# Altium PCB PCB1.PcbDoc
Units mm, origin at the board's own origin, x right, y up, seen from the top; angles counter-clockwise.
Board outline 150 x 100 mm, 2 copper layers (Top Layer, Bottom Layer); 54 components, 79 nets, 377 pads, 96 vias.
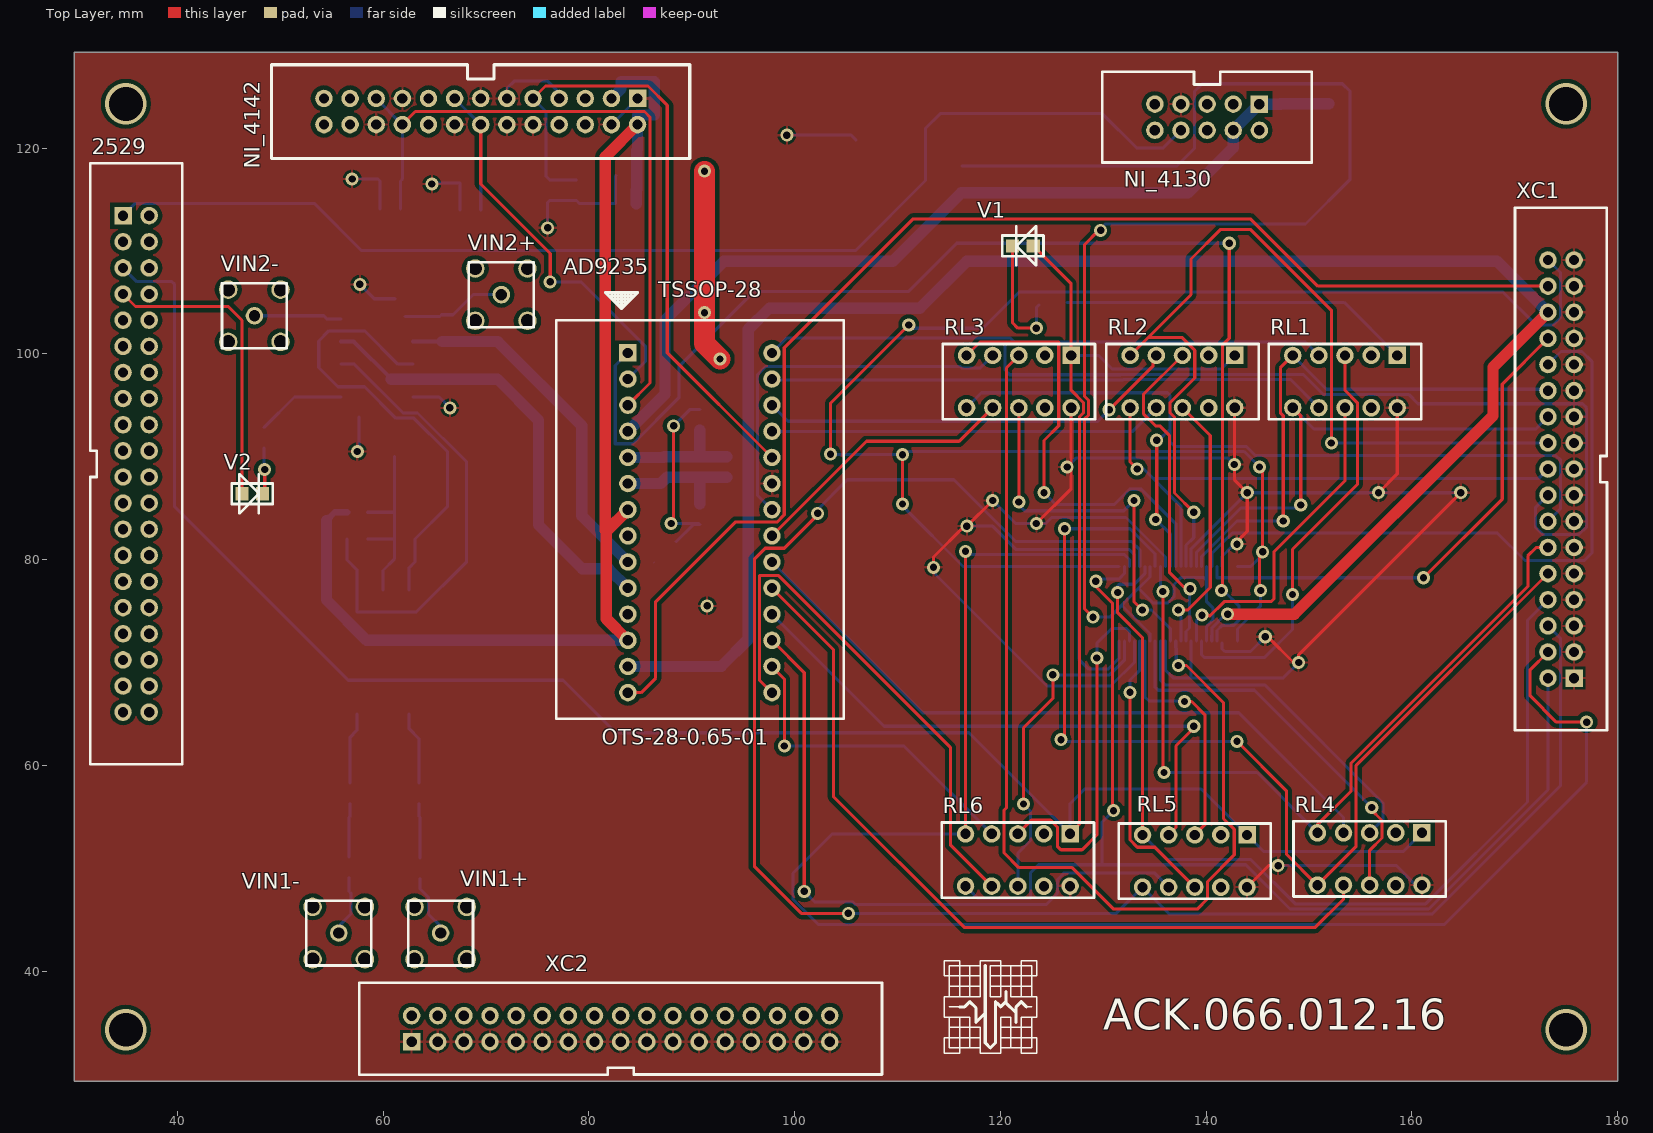
[diagram p0: Top Layer view]
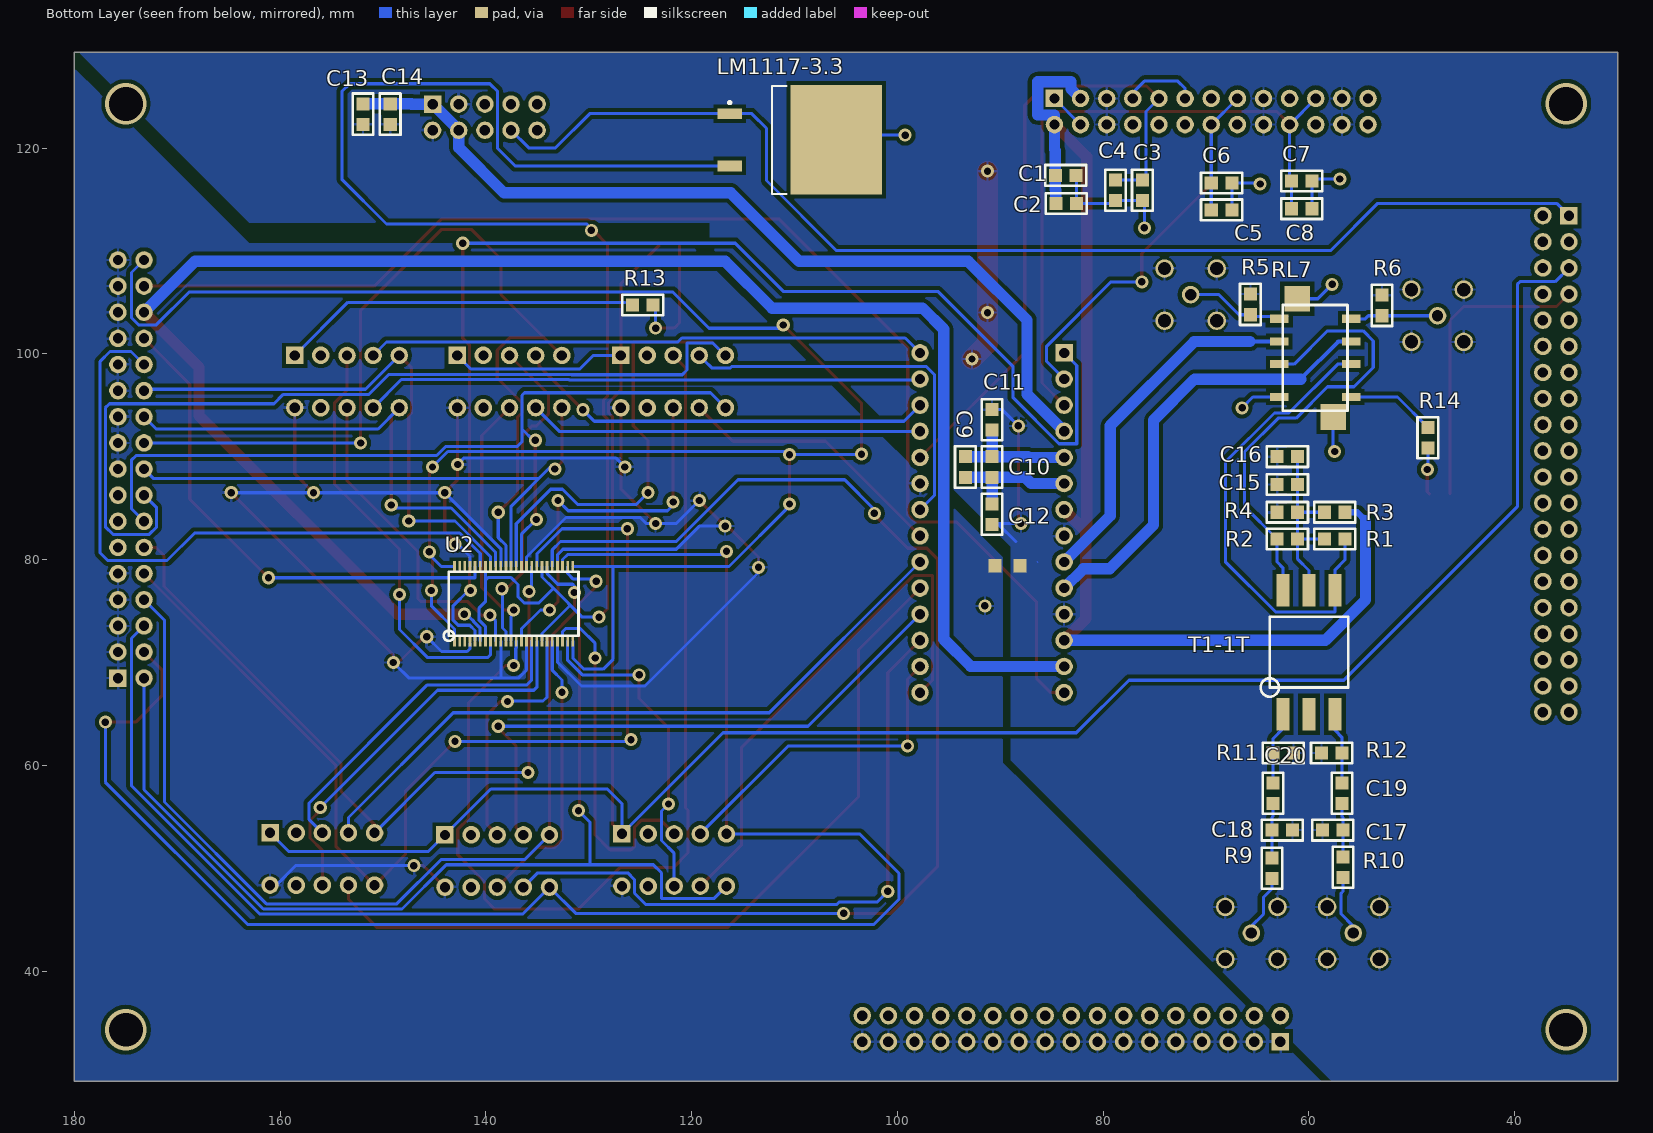
[diagram p1: Bottom Layer view, seen from below]

## Layer stack, top to bottom
Top Solder: solder mask 0.0102, Solder Resist, Dk 3.5
Top Layer: signal copper 0.0356
Dielectric 1: dielectric 0.32, FR-4, Dk 4.8
Bottom Layer: signal copper 0.0356
Bottom Solder: solder mask 0.0102, Solder Resist, Dk 3.5

## Board outline
30,29.3 180,29.3 180,129.3 30,129.3

## Design rules (kind name [scope] priority, off if disabled: settings)
Clearance [All] p1: gap=0.2 except(0.1: Arc-Text Track-Text SMDPad-Text THPad-Text Via-Text Fill-Text Region-Text Text-Text; 0.3: Arc-Via Track-Via; 0.4: Arc-Poly Track-Poly SMDPad-Poly THPad-Poly Via-Poly Poly-Poly Poly-Region Poly-Text; 0.5: THPad-Via; 1: SMDPad-Via Via-Via; 4: Fill-Poly)
PolygonConnect [All] p1: connectstyle=Relief reliefconductorwidth=0.254 reliefentries=4 polygonreliefangle="90 Angle" airgapwidth=0.254
RoutingLayers RoutingLayers_2 [InNet('GND')] p1 off: top layer_v5=FALSE bottom layer_v5=FALSE
RoutingLayers RoutingLayers_1 [InNet('AGND')] p2 off: top layer_v5=FALSE bottom layer_v5=FALSE
RoutingLayers [All] p3: top layer_v5=TRUE bottom layer_v5=TRUE
RoutingPriority [InNetClass('not gnd')] p1: routingpriority=0
RoutingVias [All] p1: holewidth=0.711 width=1.27 viastyle="Through Hole" minholewidth=0.711 minwidth=1.27 maxholewidth=0.711 maxwidth=1.27
SMDNeckDown [InNetClass('analog')] p1: percent=50.000
SilkToSilkClearance [All] p1 off: silktosilkclearance=0.254
SilkToSolderMaskClearance [IsPad] p1 off: minsilkscreentomaskgap=0.254 clearancetoexposedcopper=TRUE
SolderMaskExpansion [All] p1: expansion=0.102
Width Width_analog [InNetClass('analog')] p1: maxlimit=1.1 minlimit=1.1 preferedwidth=1.1
Width [All] p2: maxlimit=2 minlimit=0.1 preferedwidth=0.3
26 further rules are at their usual default settings.

## Classes and differential pairs
component class Sheet1: 2529 AD9235 C1 C2 C3 C4 C5 C6 C7 C8 C9 C10 C11 C12 C13 C14 LM1117-3.3 NI_4130 NI_4142 R13 RL1 RL2 RL3 RL4 RL5 RL6 U2 V1 XC1 XC2
component class Sheet2: C15 C16 C17 C18 C19 C20 R1 R2 R3 R4 R5 R6 R9 R10 R11 R12 RL7 T1-1T VIN1+ VIN1- VIN2+ VIN2-
net class "not gnd": 2529_7 AVDD CH-0 CH-1 CH_1 CH_2 CH_3 DIO_0 DIO_1 DIO_2 DIO_3 DIO_4 DIO_5 DIO_6 DIO_7 DIO_8 DIO_9 DIO_10 DIO_11 DIO_12 DIO_13 DIO_14 DIO_15 DIO_16 DIO_17 DIO_18 DIO_19 DIO_20 DIO_21 DIO_22 DIO_23 Net2529_5 NetAD9235_1 NetAD9235_15 NetAD9235_16 NetAD9235_17 NetAD9235_18 NetAD9235_19 NetAD9235_20 NetAD9235_21 NetAD9235_22 NetAD9235_25 NetAD9235_26 NetAD9235_27 NetAD9235_28 NetC15_2 NetC17_2 NetC18_1 NetC19_2 NetC20_2 NetLM1117-3.3_3 NetR1_1 NetR2_2 NetR5_2 NetR6_1 NetR9_2 NetR10_2 NetR13_1 NetR13_2 NetR14_1 NetR14_2 NetRL1_3 NetRL1_10 NetRL2_3 NetRL2_10 NetRL3_3 NetRL3_10 NetRL4_3 NetRL4_10 NetRL5_3 NetRL5_10 NetRL6_3 NetRL6_10 REFB REFT VIN+ VIN-
net class analog: AVDD CH-1 DIO_14 REFB REFT VIN+ VIN-

## Components (designator, comment, footprint, x,y, rotation, side; value= is the part's Value field where it differs from the comment)
2529 "IDC-40" IDC-40 36,89.3 r0 top
AD9235 "Adapter_TSSOP-28_DIP-28" "Adapter_TSSOP-28_DIP-28 - 14mm" 90.8,91.2 r0 top
C1 "1uF" C_0805 83.65,117.35 r180 bottom
C2 "0.1uF" C_0805 83.6,114.6 r180 bottom
C3 "1uF" C_0805 76.2,115.9 r270 bottom
C4 "0.1uF" C_0805 78.8,115.9 r270 bottom
C5 "1uF" C_0805 68.5,114 r180 bottom
C6 "0.1uF" C_0805 68.5,116.6 r180 bottom
C7 "1uF" C_0805 60.7,116.8 r180 bottom
C8 "0.1uF" C_0805 60.7,114.1 r180 bottom
C9 "10uF" C_0805 93.4,89 r90 bottom
C10 "0.1uF" C_0805 90.8,89 r90 bottom
C11 "0.1uF" C_0805 90.8,93.6 r90 bottom
C12 "0.1uF" C_0805 90.8,84.4 r90 bottom
C13 "1uF" C_0805 151.95,123.3 r270 bottom
C14 "0.1uF" C_0805 149.3,123.3 r270 bottom
C15 "0.1uF" C_0805 62.1,87.3 r180 bottom
C16 "0.33uF" C_0805 62.1,90 r180 bottom
C17 "150pF" C_0805 57.7,53.7 r180 bottom
C18 "150pF" C_0805 62.6,53.7 r180 bottom
C19 "2.2nF" C_0805 56.8,57.3 r90 bottom
C20 "2.2nF" C_0805 63.5,57.3 r90 bottom
LM1117-3.3 "LM1117-3.3" D2PAK_N 109.5,120.8 r180 bottom
NI_4130 "IDC-10" IDC-10 140.1,123 r270 top
NI_4142 "IDC-26" IDC-26 69.5,123.55 r270 top
R1 "50R" R_0805 57.5,82 r0 bottom
R2 "50R" R_0805 62.1,82 r0 bottom
R3 "1k" R_0805 57.5,84.6 r180 bottom
R4 "1k" R_0805 62.1,84.6 r180 bottom
R5 "50R" R_0805 65.7,104.8 r270 bottom
R6 "50R" R_0805 52.9,104.7 r90 bottom
R9 "50R" R_0805 63.6,50 r270 bottom
R10 "50R" R_0805 56.7,50.1 r270 bottom
R11 "50R" R_0805 62.5,61.2 r180 bottom
R12 "50R" R_0805 57.8,61.2 r180 bottom
R13 "270R" R_0805 124.75,104.75 r180 bottom
R14 "270R" R_0805 48.45,91.85 r270 bottom
RL1 "Relay_G6S-2" Relay_G6S-2 153.5,97.3 r270 top
RL2 "Relay_G6S-2" Relay_G6S-2 137.7,97.3 r270 top
RL3 "Relay_G6S-2" Relay_G6S-2 121.8,97.3 r270 top
RL4 "Relay_G6S-2" Relay_G6S-2 155.9,50.9 r270 top
RL5 "Relay_G6S-2" Relay_G6S-2 138.9,50.7 r270 top
RL6 "Relay_G6S-2" Relay_G6S-2 121.7,50.8 r270 top
RL7 "Relay_G6KU-2F-RF" Relay_G6KU-2F-RF 59.4,99.6 r0 bottom
T1-1T "T1-1T" T1-1T 60,71 r90 bottom
U2 "74AVC16244" 74AVC16244 137.3,75.7 r90 bottom
V1 "LED" LED 122.2,110.5 r180 top
V2 "LED" LED 47.3,86.4 r0 top
VIN1+ "SMB" SMB 65.6,43.7 r0 top
VIN1- "SMB" SMB 55.7,43.7 r0 top
VIN2+ "SMB" SMB 71.5,105.75 r180 top
VIN2- "SMB" SMB 47.5,103.7 r180 top
XC1 "IDC-34" IDC-34 174.5,88.8 r180 top
XC2 "IDC-34" IDC-34 83.1,34.4 r90 top

## Footprints (in the part's own frame and the unit in brackets; to place one, negate y for a bottom-side part, rotate by r counter-clockwise, add the part's x,y. Pads: shape width x height; smd on the part's side, far side on the other; paste and mask are expansions set on the pad)
74AVC16244 [mm]
  rect 1.05x0.27 smd: 1(-3.625,5.75) 2(-3.625,5.25) 3(-3.625,4.75) 4(-3.625,4.25) 5(-3.625,3.75) 6(-3.625,3.25) 7(-3.625,2.75) 8(-3.625,2.25) 9(-3.625,1.75) 10(-3.625,1.25) 11(-3.625,0.75) 12(-3.625,0.25) 13(-3.625,-0.25) 14(-3.625,-0.75) 15(-3.625,-1.25) 16(-3.625,-1.75) 17(-3.625,-2.25) 18(-3.625,-2.75) 19(-3.625,-3.25) 20(-3.625,-3.75) 21(-3.625,-4.25) 22(-3.625,-4.75) 23(-3.625,-5.25) 24(-3.625,-5.75) 25(3.625,-5.75) 26(3.625,-5.25) 27(3.625,-4.75) 28(3.625,-4.25) 29(3.625,-3.75) 30(3.625,-3.25) 31(3.625,-2.75) 32(3.625,-2.25) 33(3.625,-1.75) 34(3.625,-1.25) 35(3.625,-0.75) 36(3.625,-0.25) 37(3.625,0.25) 38(3.625,0.75) 39(3.625,1.25) 40(3.625,1.75) 41(3.625,2.25) 42(3.625,2.75) 43(3.625,3.25) 44(3.625,3.75) 45(3.625,4.25) 46(3.625,4.75) 47(3.625,5.25) 48(3.625,5.75)
  silkscreen extent -3.6,-6.3 3.1,6.8
"Adapter_TSSOP-28_DIP-28 - 14mm" [mm] "from aliexpress"
  rect 1.7x1.7 hole 1: 1(-7,8.89)
  round 1.7 hole 1: 2(-7,6.35) 3(-7,3.81) 4(-7,1.27) 5(-7,-1.27) 6(-7,-3.81) 7(-7,-6.35) 8(-7,-8.89) 9(-7,-11.43) 10(-7,-13.97) 11(-7,-16.51) 12(-7,-19.05) 13(-7,-21.59) 14(-7,-24.13) 15(7,-24.13) 16(7,-21.59) 17(7,-19.05) 18(7,-16.51) 19(7,-13.97) 20(7,-11.43) 21(7,-8.89) 22(7,-6.35) 23(7,-3.81) 24(7,-1.27) 25(7,1.27) 26(7,3.81) 27(7,6.35) 28(7,8.89)
  silkscreen extent -13.97,-26.67 13.97,14.76
C_0805 [mm]
  rect 1.27x1.27 smd: 1(-1,0) 2(1,0)
  silkscreen extent -2,-1 2,1
D2PAK_N [mm] "D2-PAK, 4-Leads, Body 8.8x10.4mm, Pitch 2.54mm, Lead Span 15.1mm, IPC Medium Density"
  rect 2.4x1.05 smd: 1(-6.8,2.54) 3(-6.8,-2.54)
  rect 8.9x10.65 smd: 2(3.55,0)
  silkscreen extent -6.93,-5.25 -1.3,5.25, body extent -2.7,-5.28 6.3,5.28, height 4.69
IDC-10 [mm]
  rect 1.7x1.7 hole 1: 1(-1.27,5.08)
  round 1.7 hole 1: 2(1.27,5.08) 3(-1.27,2.54) 4(1.27,2.54) 5(-1.27,0) 6(1.27,0) 7(-1.27,-2.54) 8(1.27,-2.54) 9(-1.27,-5.08) 10(1.27,-5.08)
  silkscreen extent -4.4,-10.17 4.4,10.18
IDC-26 [mm]
  rect 1.7x1.7 hole 1: 1(-1.27,15.24)
  round 1.7 hole 1: 2(1.27,15.24) 3(-1.27,12.7) 4(1.27,12.7) 5(-1.27,10.16) 6(1.27,10.16) 7(-1.27,7.62) 8(1.27,7.62) 9(-1.27,5.08) 10(1.27,5.08) 11(-1.27,2.54) 12(1.27,2.54) 13(-1.27,0) 14(1.27,0) 15(-1.27,-2.54) 16(1.27,-2.54) 17(-1.27,-5.08) 18(1.27,-5.08) 19(-1.27,-7.62) 20(1.27,-7.62) 21(-1.27,-10.16) 22(1.27,-10.16) 23(-1.27,-12.7) 24(1.27,-12.7) 25(-1.27,-15.24) 26(1.27,-15.24)
  silkscreen extent -4.55,-20.32 4.55,20.31
IDC-34 [mm]
  rect 1.7x1.7 hole 1: 1(-1.27,20.32)
  round 1.7 hole 1: 2(1.27,20.32) 3(-1.27,17.78) 4(1.27,17.78) 5(-1.27,15.24) 6(1.27,15.24) 7(-1.27,12.7) 8(1.27,12.7) 9(-1.27,10.16) 10(1.27,10.16) 11(-1.27,7.62) 12(1.27,7.62) 13(-1.27,5.08) 14(1.27,5.08) 15(-1.27,2.54) 16(1.27,2.54) 17(-1.27,0) 18(1.27,0) 19(-1.27,-2.54) 20(1.27,-2.54) 21(-1.27,-5.08) 22(1.27,-5.08) 23(-1.27,-7.62) 24(1.27,-7.62) 25(-1.27,-10.16) 26(1.27,-10.16) 27(-1.27,-12.7) 28(1.27,-12.7) 29(-1.27,-15.24) 30(1.27,-15.24) 31(-1.27,-17.78) 32(1.27,-17.78) 33(-1.27,-20.32) 34(1.27,-20.32)
  silkscreen extent -4.47,-25.4 4.48,25.4
IDC-40 [mm]
  rect 1.7x1.7 hole 1: 1(-1.27,24.13)
  round 1.7 hole 1: 2(1.27,24.13) 3(-1.27,21.59) 4(1.27,21.59) 5(-1.27,19.05) 6(1.27,19.05) 7(-1.27,16.51) 8(1.27,16.51) 9(-1.27,13.97) 10(1.27,13.97) 11(-1.27,11.43) 12(1.27,11.43) 13(-1.27,8.89) 14(1.27,8.89) 15(-1.27,6.35) 16(1.27,6.35) 17(-1.27,3.81) 18(1.27,3.81) 19(-1.27,1.27) 20(1.27,1.27) 21(-1.27,-1.27) 22(1.27,-1.27) 23(-1.27,-3.81) 24(1.27,-3.81) 25(-1.27,-6.35) 26(1.27,-6.35) 27(-1.27,-8.89) 28(1.27,-8.89) 29(-1.27,-11.43) 30(1.27,-11.43) 31(-1.27,-13.97) 32(1.27,-13.97) 33(-1.27,-16.51) 34(1.27,-16.51) 35(-1.27,-19.05) 36(1.27,-19.05) 37(-1.27,-21.59) 38(1.27,-21.59) 39(-1.27,-24.13) 40(1.27,-24.13)
  silkscreen extent -4.47,-29.21 4.48,29.21
LED [mm]
  rect 1.27x1.27 smd: 1(-1,0) 2(1,0)
  silkscreen extent -2,-1.91 2,1.91
R_0805 [mm]
  rect 1.27x1.27 smd: 1(-1,0) 2(1,0)
  silkscreen extent -2,-1 2,1
Relay_G6KU-2F-RF [mm]
  rect 1.8x0.8 smd: 1(-3.5,3.8) 2(-3.5,0.6) 3(-3.5,-1.6) 4(-3.5,-3.8) 5(3.5,-3.8) 6(3.5,-1.6) 7(3.5,0.6) 8(3.5,3.8)
  rect 2.5x2.5 smd: GND(-1.75,5.75) GND(1.75,-5.75)
  silkscreen extent -3.15,-5.15 3.15,5.15
Relay_G6S-2 [mm]
  rect 1.7x1.7 hole 1: 1(-2.54,5.08)
  round 1.7 hole 1: 3(-2.54,0) 4(-2.54,-2.54) 5(-2.54,-5.08) 8(2.54,-5.08) 9(2.54,-2.54) 10(2.54,0) 12(2.54,5.08)
  silkscreen extent -3.65,-7.4 3.65,7.4
SMB [mm]
  round 1.8 hole 1.3: 0(-2.54,-2.54) 0(-2.54,2.54) 0(2.54,-2.54) 0(2.54,2.54)
  round 1.7 hole 1.1: 1(0,0)
  silkscreen extent -3.15,-3.15 3.15,3.15
T1-1T [mm]
  rect 3.18x1.27 smd: 1(6.03,2.54) 2(6.03,0) 3(6.03,-2.54) 4(-6.03,-2.54) 5(-6.03,0) 6(-6.03,2.54)
  silkscreen extent -4.32,-3.81 3.43,4.7

## Part data
2529: "разъем 2529"
AD9235: "from aliexpress"
C1 C2 C3 C4 C5 C6 C7 C8 C9 C10 C11 C12 C13 C14 C15 C16 C17 C18 C19 C20: library part "capacitor 0805"
LM1117-3.3: library part "Volt Reg", "Voltage Regulator"
NI_4130: "разъем 4130"
NI_4142: "разъем 4142"
R1 R2 R3 R4 R5 R6 R9 R10 R11 R12 R13 R14: library part "resistor 0805"

## Free pads (board coordinates)
  rect 1.27x1.27 smd far side: 1(88.1,79.4) 1(90.5,79.4)

## Via types
v1: diameter 1.27, hole 0.711, Top Layer to Bottom Layer, 80 vias
v2: diameter 1.7, hole 1, Top Layer to Bottom Layer, 12 vias
v3: diameter 4, hole 3.3, Top Layer to Bottom Layer, 4 vias

## Nets (pads, with @x,y where several pads share a name; then routed paths per layer and width w, separated by ;. In a path a pad name is that pad's centre, name@x,y a point inside that pad or via, vN(x,y) a via of type N, cw(c..) or ccw(c..) an arc to the next point about the centre after c; other vN are vias at no path point)
2529_7: 2529.7 V2.1 | length 29.5
  Top Layer w0.3: 2529.7 35.943,104.597 44.958,104.597 46.3,103.255 V2.1
AGND: AD9235.8 AD9235.11 C11.2 C12.1 C13.2 C14.2 C15.1 C16.1 C17.1 C18.2 NI_4130.2 NI_4130.3 NI_4142.5 NI_4142.6 NI_4142.17 NI_4142.18 NI_4142.23 NI_4142.24 pad.1@88.1,79.4 R4.1 R5.1 R6.2 R11.2 R12.1 VIN1+.0 VIN1-.0 VIN2+.0 VIN2-.0 | length 38.2
  Top Layer w0.3: v1(88,83.5) 88,83.25 88.25,83.5 v1(88.25,93)
  Top Layer w2: v1(91.25,117.75) v1(91.25,104) 91.25,101 v1(92.75,99.5)
  Bottom Layer w0: 86.3,79.7 86.4,79.8
  Bottom Layer w0.3: v1(88,83.5) 90.7,83.5 C12.1 90.15,83.4 88.5,81.75 ; v1(88.25,93) 89.85,94.6 C11.2
AVDD: AD9235.7 AD9235.12 C1.1 C2.1 NI_4142.2 NI_4142.3 R3.2 | length 115.1
  Top Layer w1.1: AD9235.12 81.7,74.25 81.7,82.75 ; AD9235.7 81.7,82.75 ; NI_4142.2 81.6,119.14 81.6,82.85 81.7,82.75
  Bottom Layer w0.635: 54.5,83.8 55.3,84.6 R3.2
  Bottom Layer w1.1: 54.5,83.8 54.5,76.07 58.42,72.15 AD9235.12 ; NI_4142.3 83.134,125.754 83.134,126.441 86.36,126.441 86.36,123.215 84.74,123.215 NI_4142.2 84.74,119.851 84.65,119.761 C1.1 84.65,115.976 84.6,115.926 C2.1
CH-0: 2529.1 LM1117-3.3.1 NI_4130.8 | length 115.8
  Bottom Layer w0.3: 2529.1 35.93,114.63 53.315,114.63 57.912,110.033 105.918,110.033 112.725,116.84 112.725,121.92 114.145,123.34 LM1117-3.3.1 129.91,123.34 133.235,120.015 135.845,120.015 NI_4130.8
CH-1: AD9235.4 C13.1 C14.1 NI_4130.1 NI_4130.4 | length 86.6
  Bottom Layer w1.1: AD9235.4 87.401,96.071 87.401,103.276 93.125,109 109.559,109 116.205,115.646 138.244,115.646 142.64,120.042 NI_4130.4 142.621,121.73 145.161,124.27 NI_4130.1 147.218,124.27 147.248,124.3 C14.1 150.622,124.3 C13.1
CH_1: AD9235.24 C3.1 C4.1 NI_4142.9 | length 64
  Top Layer w0.3: NI_4142.9 75.795,126.035 85.75,126.035 87.63,124.155 87.63,100.1 AD9235.24
  Bottom Layer w0.3: NI_4142.9 75.844,123.556 75.844,117.256 C3.1 C4.1
CH_2: AD9235.2 C5.1 C6.1 NI_4142.14 NI_4142.15 | length 45.7
  Top Layer w0.3: NI_4142.14 69.5,116.5 76.25,109.75 v1(76.25,107)
  Bottom Layer w0.3: NI_4142.15 66.954,124.82 69.494,122.28 NI_4142.14 C6.1 C5.1 ; v1(76.25,107) 79.25,107 85.5,100.75 85.5,99.25 AD9235.2
CH_3: AD9235.3 C7.1 C8.1 NI_4142.20 NI_4142.21 | length 65.6
  Top Layer w0.3: NI_4142.20 63.146,123.546 85.408,123.546 85.954,123 85.954,97.164 AD9235.3
  Bottom Layer w0.3: NI_4142.21 59.334,124.82 61.874,122.28 NI_4142.20 61.88,116.98 C7.1 C8.1
DIO_0: RL6.8 U2.26 XC1.2 | length 109.9
  Top Layer w0.3: v1(129.285,77.895) 129.285,77.381 130.9,75.766 130.9,55.7 v1(131,55.6)
  Bottom Layer w0.3: RL6.8 117.839,47.041 122.936,47.041 122.936,49.555 123.723,50.343 129.9,50.343 ; v1(129.285,77.895) 129.49,78.1 131.5,78.1 132.05,78.65 U2.26 ; v1(131,55.6) 129.9,54.5 129.9,50.343 ; XC1.2 173.23,57.635 161.628,46.033 148.158,46.033 143.848,50.343 129.9,50.343
DIO_1: RL6.5 U2.27 XC1.4 | length 166.5
  Top Layer w0.3: RL6.5 v1(116.62,80.8) ; XC1.4 171.5,69.29 171.5,66.75 174.05,64.2 v1(176.987,64.2)
  Bottom Layer w0.3: RL6.5 103.683,53.34 99.847,49.505 99.847,46.99 102.304,44.533 163.151,44.533 176.987,58.369 v1(176.987,64.2) ; v1(116.62,80.8) 116.92,80.5 132.06,80.5 132.55,80.01 U2.27
DIO_2: RL5.8 U2.29 XC1.6 | length 178.9
  Top Layer w0.3: v1(102.25,84.5) 102.25,84.343 99.009,81.102 97.155,81.102 96.088,80.035 96.088,50.19 100.66,45.618 v1(105.232,45.618)
  Bottom Layer w0.3: v1(102.25,84.5) 102.25,84.876 105.131,87.757 115.493,87.757 121.5,81.75 132.75,81.75 133.55,80.95 U2.29 ; v1(105.232,45.618) 131.278,45.618 RL5.8 136.447,45.533 161.96,45.533 174.447,58.02 174.447,72.343 XC1.6
DIO_3: RL5.5 U2.30 XC1.8 | length 93.8
  Top Layer w0.3: v1(131.4,76.8) 131.4,74.823 133.82,72.403 RL5.5
  Bottom Layer w0.3: v1(131.4,76.8) 131.4,77.425 131.575,77.6 133.021,77.6 134.05,78.63 U2.30 ; RL5.5 136.217,50.843 144.356,50.843 148.666,46.533 161.341,46.533 171.247,56.439 171.247,74.117 XC1.8
DIO_4: RL4.8 U2.32 XC1.10 | length 105.7
  Top Layer w0.3: v1(125.9,62.5) 126.25,62.85 v1(126.25,83) ; v1(143.002,62.332) 147.803,57.531 147.803,51.377 RL4.8 154.584,52.124 154.584,59.994 XC1.10
  Bottom Layer w0.3: v1(125.9,62.5) 125.9,62.4 125.968,62.332 v1(143.002,62.332) ; v1(126.25,83) 132.6,83 135.05,80.55 U2.32
DIO_5: RL4.5 U2.33 XC1.12 | length 75.3
  Top Layer w0.3: v1(135.8,76.9) 135.8,59.4 v1(135.9,59.3) ; RL4.5 150.82,54.22 154.084,57.484 154.084,60.201 171.272,77.389 171.272,80.367 172.085,81.18 XC1.12
  Bottom Layer w0.3: U2.33 135.55,77.25 135.5,77.2 v1(135.8,76.9) ; v1(135.9,59.3) 144.96,59.3 RL4.5
DIO_6: RL3.8 U2.35 XC1.14 | length 86
  Top Layer w0.3: v1(135.1,83.9) 135.1,83.868 135.331,84.099 135.2,84.231 v1(135.2,91.6)
  Bottom Layer w0.3: RL3.8 118.175,96.215 136.246,96.215 136.5,95.961 136.5,92.7 ; v1(135.1,83.9) 136.55,82.45 U2.35 136.55,80.315 ; v1(135.2,91.6) 135.4,91.6 136.5,92.7 ; XC1.14 174.447,84.937 174.447,89.7 174.419,89.7 174,90.119 144.787,90.119 143.907,91 136.94,91 136.5,91.44 136.5,92.7
DIO_7: RL3.5 U2.36 XC1.16 | length 129.8
  Top Layer w0.3: RL3.5 118.023,101.143 125.654,101.143 125.68,101.117 125.68,93 124.25,91.57 v1(124.25,86.5)
  Bottom Layer w0.3: RL3.5 117.92,101.04 120.46,101.04 120.46,98.425 120.917,97.968 131.697,97.968 131.729,98 149.421,98 151.361,96.06 159.691,96.06 160.603,95.148 176.589,95.148 176.987,94.75 176.987,83.185 176.251,82.448 172.72,82.448 172.009,83.16 172.009,85.039 XC1.16 ; v1(124.25,86.5) 125.415,85.335 131.05,85.335 132.551,86.835 133.699,86.835 137.05,83.484 U2.36
DIO_8: RL2.8 U2.37 XC1.18 | length 56.8
  Top Layer w0.3: RL2.8 132.62,89.48 v1(133.3,88.8)
  Bottom Layer w0.3: v1(133.3,88.8) 133.532,88.8 133.733,89 137.55,85.183 U2.37 ; 134.833,87.9 172.33,87.9 XC1.18
DIO_9: RL2.5 U2.38 XC1.20 | length 92.2
  Top Layer w0.3: RL2.5 138.532,105.752 138.532,109.22 141.376,112.065 144.348,112.065 152.171,104.242 v1(152.171,91.34) ; 134.38,101.6 137.637,101.6 138.9,100.337 138.9,97.657 136.5,95.257 136.5,94.263 136.923,93.84 136.923,86.477 v1(138.8,84.6)
  Bottom Layer w0.3: U2.38 138.05,81.381 138.8,82.13 v1(138.8,84.6) ; v1(152.171,91.34) XC1.20
DIO_10: RL1.8 U2.40 XC1.22 | length 49.5
  Top Layer w0.3: RL1.8 149.045,94.135 149.2,93.98 149.2,93.29 v1(149.2,85.3)
  Bottom Layer w0.3: U2.40 139.05,80.681 143.383,85.014 148.9,85.014 148.9,85.27 148.93,85.3 v1(149.2,85.3) ; RL1.8 150.48,92.7 172.05,92.7 XC1.22
DIO_11: RL1.5 U2.41 XC1.24 | length 53.3
  Top Layer w0.3: v1(147.5,83.75) 147.5,93.983 147.22,94.263 147.22,98.637 147.218,98.639 RL1.5
  Bottom Layer w0.3: U2.41 139.55,80.292 143.008,83.75 v1(147.5,83.75) ; RL1.5 151.7,96.56 173.09,96.56 XC1.24
DIO_12: U2.43 XC1.26 | length 64.3
  Bottom Layer w0.3: U2.43 140.55,80.585 142.551,82.585 168.315,82.585 170.992,79.908 176.759,79.908 177.495,80.645 177.495,99.263 176.53,100.228 174.498,100.228 XC1.26
DIO_13: U2.44 XC1.28 | length 49.5
  Top Layer w0.3: v1(161.138,78.232) 168.783,85.877 168.783,97.053 XC1.28
  Bottom Layer w0.3: U2.44 141.05,78.232 v1(161.138,78.232)
DIO_14: AD9235.13 U2.6 XC1.30 | length 174.2
  Top Layer w1.1: v1(142.1,74.7) 148.6,74.7 167.883,93.983 167.883,98.693 XC1.30
  Bottom Layer w0.3: U2.6 140.55,72.243 140.55,72.657 140.565,72.672 140.565,73.324 141.185,73.943 141.185,73.992 v1@141.591,74.398
  Bottom Layer w1.1: AD9235.13 92.86,69.61 95.5,72.25 95.5,102.383 97.561,104.445 112.192,104.445 116.747,109 168.27,109 XC1.30
DIO_15: AD9235.14 XC1.32 | length 125.1
  Top Layer w0.3: AD9235.14 85.09,67.07 86.5,68.48 86.5,75.908 94.234,83.642 98.289,83.642 99,84.353 99,100.6 111.485,113.085 144.355,113.085 150.86,106.58 XC1.32
DIO_16: U2.1 U2.24 U2.25 U2.48 XC1.34 | length 196.3
  Top Layer w0.3: v1(103.5,90.25) 103.5,95.2 v1(111.1,102.8) ; v1(110.5,85.4) v1@110.5,90.6 ; v1(145.2,89) 145.5,88.7 v1(145.5,80.75) ; v1@145.2,80.7 145.2,77.1 v1(145.3,77)
  Bottom Layer w0.3: v1(103.5,90.25) 103.55,90.2 v1(110.5,90.2) 110.8,90.5 143.7,90.5 v1(145.2,89) ; v1(110.5,85.4) 110.5,85.2 116.376,79.324 127.629,79.324 ; v1@111.1,102.489 118.313,102.489 121.818,105.994 168.859,105.994 172.034,102.819 173.761,102.819 174.447,103.505 174.447,107.903 XC1.34 ; U2.24 131.55,70.427 130.473,69.349 128.6,69.349 127.629,70.321 127.629,79.324 ; U2.25 127.629,79.324 ; U2.1 143.05,73.258 145.3,75.508 v1(145.3,77) ; U2.48 144.325,79.325 145.2,80.2 v1@145.2,80.7 ; v1@145.2,80.8 145.25,80.75 v1(145.5,80.75)
DIO_17: XC2.2
DIO_18: XC2.4
DIO_19: XC2.6
DIO_20: XC2.8
DIO_21: XC2.10
DIO_22: XC2.12
DIO_23: XC2.14
GND: AD9235.23 C1.2 C2.2 C3.2 C4.2 C5.2 C6.2 C7.2 C8.2 LM1117-3.3.2 NI_4130.7 NI_4142.1 NI_4142.4 NI_4142.7 NI_4142.10 NI_4142.11 NI_4142.12 NI_4142.13 NI_4142.16 NI_4142.19 NI_4142.22 pad.1@90.5,79.4 RL1.12 RL2.12 RL3.12 RL4.12 RL5.12 RL6.12 RL7.8 RL7.GND U2.4 U2.10 U2.15 U2.21 U2.28 U2.34 U2.39 U2.45 XC1.1 XC1.3 XC1.5 XC1.7 XC1.9 XC1.11 XC1.13 XC1.15 XC1.17 XC1.19 XC1.21 XC1.23 XC1.25 XC1.27 XC1.29 XC1.31 XC1.33 XC2.1 XC2.3 XC2.5 XC2.7 XC2.9 XC2.11 XC2.13 XC2.15 XC2.17 XC2.19 XC2.21 XC2.23 XC2.25 XC2.27 XC2.29 XC2.31 XC2.33 | length 285
  Top Layer w0.3: v1(113.5,79.25) 113.5,80.25 116.5,83.25 v1(116.75,83.25) v1(119.25,85.75) ; v1(123.5,83.5) 126.88,86.88 RL3.12 ; v1@142.75,81.5 144,82.75 v1(144,86.5) 142.78,87.72 RL2.12 ; RL5.12 146.07,50.25 v1(147,50.25) ; v1(145.75,72.5) 146,72.5 148.5,70 v1(149,70) 149,70.75 v1(164.75,86.5) ; v1(156.75,86.5) 158.58,88.33 RL1.12
  Bottom Layer w0.3: v1(57,117) 59.5,117 C7.2 C8.2 ; v1(57.5,90.5) 57.65,90.65 RL7.GND@57.65,93.85 ; v1(57.75,106.75) 59.15,105.35 RL7.GND@61.15,105.35 ; RL7.8 65.45,95.8 v1(66.5,94.75) ; v1(64.75,116.5) 64.85,116.6 C6.2 C5.2 ; NI_4142.11 72.04,125.79 72.75,126.5 76,126.5 77.12,125.38 NI_4142.7 ; v1(76,112.25) 76,114.7 C3.2 C4.2 79.1,114.6 C2.2 82.6,117.3 C1.2 ; NI_4142.4 NI_4142.1 ; v1(99.25,121.25) 105.5,121.25 LM1117-3.3.2 ; v1(113.5,79.25) 113.5,78.75 124.535,67.715 130.715,67.715 133.05,70.05 U2.21 ; v1(116.75,83.25) 119.25,83.25 121.5,81 132.5,81 133.05,80.45 U2.28 ; v1(119.25,85.75) 121.5,83.5 v1(123.5,83.5) 124.415,83.5 125,84.085 132.222,84.085 136.05,80.257 U2.34 ; v1(126.5,89) 127.385,89.885 142.115,89.885 v1(142.75,89.25) ; U2.15 136.05,69.25 136.8,68.5 138.5,68.5 ; U2.10 138.55,68.55 138.5,68.5 ; U2.39 138.55,81.05 v1(144,86.5) v1(156.75,86.5) 164.5,86.5 164.75,86.25 v1(164.75,86.5) ; U2.45 141.55,80.3 v1@142.5,81.25 ; U2.4@141.565,71.883 141.565,71.315 141.819,71.061 144.311,71.061 v1(145.75,72.5) ; v1(147,50.25) 158.5,50.25 160.39,48.36 RL4.12 ; v1@148.75,69.75 147.5,68.5 138.5,68.5
  other v1: 91.5,75.5 143,81.5
Net2529_5: 2529.5 RL2.1 RL3.1 RL4.1 RL5.1 RL6.1 V1.1 | length 245.2
  Top Layer w0.3: V1.1 126.88,106.82 RL3.1 126.88,96.457 128.08,95.257 128.08,94.263 127.7,93.883 127.7,54.26 RL6.1
  Bottom Layer w0.3: 2529.5 36.07,107.01 39.49,107.01 39.75,106.75 39.75,85.142 56.617,68.275 77.5,68.275 82.605,63.17 116.95,63.17 RL6.1 126.78,56.28 128.2,57.7 139.52,57.7 RL5.1 145.58,51.64 159.18,51.64 RL4.1 ; RL3.1 129.568,99.84 130.882,98.527 141.466,98.527 RL2.1
NetAD9235_1: AD9235.1 U2.5 | length 120.2
  Top Layer w0.3: v1(141.5,77) 141.58,77.08 141.58,100.835 142.25,101.505 v1(142.25,110.75)
  Bottom Layer w0.3: AD9235.1 82.575,98.865 82.575,91.262 84.289,91.262 88.75,95.723 88.75,98.758 96.037,106.045 111.049,106.045 115.754,110.75 v1(142.25,110.75) ; U2.5@141.065,72.09 141.065,73.115 141.565,73.615 142.7,73.615 143.185,74.1 143.185,75.515 141.7,77 v1(141.5,77)
NetAD9235_15: AD9235.15 RL6.9 | length 52.5
  Top Layer w0.3: AD9235.15 96.596,68.274 96.596,78.435 98.45,78.435 115.138,61.747 115.138,52.282 RL6.9
NetAD9235_16: AD9235.16 RL6.4 | length 31.9
  Top Layer w0.3: AD9235.16 99.009,68.401 v1(99.009,61.874)
  Bottom Layer w0.3: v1(99.009,61.874) 110.626,61.874 RL6.4
NetAD9235_17: AD9235.17 RL5.9 | length 64.3
  Top Layer w0.3: AD9235.17 100.94,69.01 v1(100.94,47.752)
  Bottom Layer w0.3: v1(100.94,47.752) 101.988,46.703 105.682,46.703 105.903,46.482 124.46,46.482 125.552,47.574 125.552,48.895 126.213,49.555 134.965,49.555 RL5.9
NetAD9235_18: AD9235.18 RL5.4 | length 57.1
  Top Layer w0.3: RL5.4 137.075,53.955 137.075,61.9 138.8,63.625 v1(138.8,63.8)
  Bottom Layer w0.3: AD9235.18 108.69,63.8 v1(138.8,63.8)
NetAD9235_19: AD9235.19 RL4.9 | length 80.1
  Top Layer w0.3: AD9235.19 103.784,71.246 103.784,56.947 116.481,44.25 150.62,44.25 153.36,46.99 RL4.9
NetAD9235_20: AD9235.20 RL4.4 | length 67.3
  Bottom Layer w0.3: AD9235.20 112.455,65.115 143.178,65.115 153.36,54.933 RL4.4
NetAD9235_21: AD9235.21 RL3.9 | length 26.6
  Top Layer w0.3: AD9235.21 106.99,91.5 116,91.5 RL3.9
NetAD9235_22: AD9235.22 RL3.4 | length 37.7
  Bottom Layer w0.3: AD9235.22 96.4,86.25 96.4,97.981 97.169,98.75 116.113,98.75 116.223,98.64 118.06,98.64 118.76,99.34 118.76,99.84 RL3.4
NetAD9235_25: AD9235.25 RL2.9 | length 38.3
  Bottom Layer w0.3: AD9235.25 132.87,92.47 RL2.9
NetAD9235_26: AD9235.26 RL2.4 | length 41.1
  Top Layer w0.3: v1(130.581,94.564) 134.849,98.831 134.849,99.529 RL2.4
  Bottom Layer w0.3: AD9235.26 99.363,93.447 129.464,93.447 v1(130.581,94.564)
NetAD9235_27: AD9235.27 RL1.9 | length 54.3
  Bottom Layer w0.3: AD9235.27 97.882,97.468 131.904,97.468 131.936,97.5 148.22,97.5 RL1.9
NetAD9235_28: AD9235.28 RL1.4 | length 54.5
  Bottom Layer w0.3: AD9235.28 99.25,101.54 120.96,101.54 121.357,101.143 149.657,101.143 RL1.4
NetC15_2: C15.2 C16.2 R1.2 R2.1 R3.1 R4.2 T1-1T.2 | length 18.6
  Bottom Layer w0.3: R1.2 R2.1 ; R3.1 R4.2 ; T1-1T.2 60,78.943 61.1,80.043 R2.1 ; C16.2 61.1,88.646 C15.2 R4.2 ; R2.1 R4.2
NetC17_2: C17.2 C19.1 R10.1 | length 5.2
  Bottom Layer w0.3: R10.1 C17.2 56.7,54.94 56.8,55.04 C19.1
NetC18_1: C18.1 C20.1 R9.1 | length 5.3
  Bottom Layer w0.3: C20.1 63.5,55.04 63.6,54.94 C18.1 R9.1
NetC19_2: C19.2 R12.2 T1-1T.4 | length 6.9
  Bottom Layer w0.3: C19.2 R12.2 56.8,62.738 57.46,63.398 T1-1T.4
NetC20_2: C20.2 R11.1 T1-1T.6 | length 7.1
  Bottom Layer w0.3: T1-1T.6 62.54,63.546 63.5,62.586 R11.1 63.5,59.741 C20.2
NetLM1117-3.3_3: LM1117-3.3.3 U2.7 U2.18 U2.31 U2.42 | length 148.2
  Top Layer w0.3: v1(129,74.4) 128.2,75.2 128.2,93.676 128.58,94.056 128.58,95.464 128.2,95.844 128.2,110.623 129.577,112 v1(129.75,112)
  Bottom Layer w0.3: LM1117-3.3.3 137.16,118.26 138.862,119.962 138.862,125.5 139.612,126.25 153.25,126.25 154,125.5 154,116.967 149.657,112.624 130.2,112.624 129.577,112 v1(129.75,112) ; v1(129,74.4) 130.636,74.4 133.436,77.2 ; 131.883,75.483 134.55,72.815 U2.18 ; U2.31 134.55,78.6 134.55,78.314 133.436,77.2 ; U2.7 140.05,73.516 140.685,74.15 140.685,75.265 140.05,75.9 140.05,78 ; U2.42 140.05,78 ; 133.436,77.2 134.836,75.8 136.3,75.8 136.885,76.385 136.885,77.585 137.55,78.25 139.8,78.25 140.05,78
NetR1_1: R1.1 RL7.2 T1-1T.3 | length 46
  Bottom Layer w0.3: RL7.2 57.207,99 61.957,94.25 63.357,94.25 68.123,89.484 68.123,79.781 63.245,74.904 57.46,74.904 T1-1T.3 57.46,79.019 56.5,79.979 R1.1
NetR2_2: R2.2 RL7.7 T1-1T.1 | length 44.4
  Bottom Layer w0.3: T1-1T.1 62.54,79.223 63.1,79.783 R2.2 66.25,85.15 66.25,90.5 63,93.75 61.25,93.75 58.201,96.799 55.626,96.799 53.75,98.675 53.75,101.25 54.735,102.235 58.208,102.235 61.443,99 RL7.7
NetR5_2: R5.2 RL7.5 VIN2+.1 | length 10.2
  Bottom Layer w0.3: RL7.5@62.132,103.632 65.532,103.632 R5.2 66.8,103.8 68.75,105.75 VIN2+.1
NetR6_1: R6.1 RL7.4 VIN2-.1 | length 8.5
  Bottom Layer w0.3: VIN2-.1 R6.1 54.229,103.7 54.529,103.4 RL7.4
NetR9_2: R9.2 VIN1+.1 | length 6.1
  Bottom Layer w0.3: R9.2 63.6,48.006 64.414,47.192 64.414,45.542 65.6,44.357 VIN1+.1
NetR10_2: R10.2 VIN1-.1 | length 6
  Bottom Layer w0.3: VIN1-.1 55.7,44.374 56.871,45.544 56.871,47.574 56.7,47.745 R10.2
NetR13_1: R13.1 RL1.1 | length 34.2
  Bottom Layer w0.3: 126.5,105 153.42,105 RL1.1
NetR13_2: R13.2 V1.2 | length 12.4
  Top Layer w0.3: V1.2 121.2,103 121.7,102.5 v1(123.5,102.5)
  Bottom Layer w0.3: v1(123.5,102.5) 123.5,104.5 R13.2
NetR14_1: R14.1 RL7.1 | length 8.7
  Bottom Layer w0.3: R14.1 51.4,95.8 RL7.1
NetR14_2: R14.2 V2.2 | length 4.6
  Top Layer w0.3: V2.2 48.5,86.6 v1(48.5,88.75)
  Bottom Layer w0.3: R14.2 48.45,88.8 v1(48.5,88.75)
NetRL1_3: RL1.3 U2.8 | length 41.1
  Top Layer w0.3: v1(148.4,76.6) 148.4,81 154.7,87.3 154.7,95.257 153.5,96.457 RL1.3
  Bottom Layer w0.3: U2.8 139.55,70.75 139.8,70.5 145.7,70.5 148.4,73.2 v1(148.4,76.6)
NetRL1_10: RL1.10 U2.9 | length 31.9
  Top Layer w0.3: v1(139.6,74.6) 140.236,74.6 140.337,74.5 141.752,75.915 146.315,75.915 146.618,76.218 146.618,80.782 153.5,87.663 RL1.10
  Bottom Layer w0.3: U2.9 139.05,74.05 v1(139.6,74.6)
NetRL2_3: RL2.3 U2.11 | length 31.9
  Top Layer w0.3: RL2.3 133.9,96.04 133.9,94.187 135.087,93 135.5,93 136.423,92.077 136.423,78.76 138.084,77.1 138.149,77.165 v1(138.445,77.165)
  Bottom Layer w0.3: U2.11 138.05,72.465 138.05,73.015 138.385,73.35 138.385,77.105 v1(138.445,77.165)
NetRL2_10: RL2.10 U2.12 | length 25
  Top Layer w0.3: v1(137.3,75.1) 138.217,75.1 140.405,77.288 140.405,92.055 RL2.10
  Bottom Layer w0.3: U2.12 137.55,74.464
NetRL3_3: RL3.3 U2.13 | length 99.7
  Top Layer w0.3: RL3.3 120.599,98.639 120.599,55.882 120.36,55.643 120.36,51.5 121.8,50.06 126.978,50.06 131.013,46.025 139.141,46.025 140.14,47.024 140.14,48.699 142.74,51.299 142.74,53.779 141.7,54.819 141.7,66.1 138.1,69.7 v1(137.3,69.7)
  Bottom Layer w0.3: U2.13 137.05,71.42 137.1,71.37 v1@137.1,70.3
NetRL3_10: RL3.10 U2.14 | length 37
  Top Layer w0.3: v1(121.8,85.6) RL3.10 ; v1(133,85.75) 133,75.9 v1(133.8,75.1)
  Bottom Layer w0.3: v1(121.8,85.6) 121.8,85.3 122.35,84.75 132,84.75 v1(133,85.75) ; v1(133.8,75.1) 134.7,75.1 136.55,73.25 U2.14
NetRL4_3: RL4.3 U2.16 | length 33.8
  Bottom Layer w0.3: U2.16 135.55,68.3 136.05,67.8 145.734,67.8 157.185,56.349 157.185,54.725 RL4.3
NetRL4_10: RL4.10 U2.17 | length 39
  Top Layer w0.3: RL4.10 155.9,51.743 157.1,52.943 157.1,54.64 156,55.74 156,55.9 v1(156.1,55.9)
  Bottom Layer w0.3: U2.17 135.05,67.593 135.343,67.3 144.7,67.3 v1(156.1,55.9)
NetRL5_3: RL5.3 U2.19 | length 24.1
  Top Layer w0.3: v1(137.9,66.2) 138.6,66.2 139.885,64.915 139.885,54.225 RL5.3
  Bottom Layer w0.3: U2.19 134.05,66.65 134.45,66.25 137.65,66.25 137.7,66.2 v1(137.9,66.2)
NetRL5_10: RL5.10 U2.20 | length 27.9
  Top Layer w0.3: v1(132.6,67.1) 132.62,67.08 132.62,52.743 133.323,52.04 135.02,52.04 RL5.10
  Bottom Layer w0.3: v1(132.6,67.1) 132.6,68.3 133.55,69.25 U2.20
NetRL6_3: RL6.3 U2.22 | length 34.5
  Top Layer w0.3: RL6.3 123.021,54.661 124.892,54.661 125.54,54.013 125.54,52.138 125.878,51.8 127.949,51.8 129.388,53.238 v1(129.388,70.434)
  Bottom Layer w0.3: v1(129.388,70.434) 129.388,71.858 130.832,73.302 132.248,73.302 132.55,73 U2.22
NetRL6_10: RL6.10 U2.23 | length 31.9
  Top Layer w0.3: v1(122.25,56.25) 122.25,63.65 125.1,66.5 v1(125.1,68.8)
  Bottom Layer w0.3: RL6.10 121.7,51.45 122.94,52.69 122.94,55.56 v1(122.25,56.25) ; v1(125.1,68.8) 130.631,68.8 132.05,70.22 132.05,71.878 U2.23
REFB: AD9235.5 C9.2 C10.2 C11.1 | length 12.2
  Bottom Layer w1.1: AD9235.5 87.249,89.93 87.319,90 C10.2 ; C11.1 C10.2 ; C9.2 C10.2
REFT: AD9235.6 C9.1 C10.1 C12.2 | length 12.5
  Bottom Layer w1.1: AD9235.6 86.995,87.39 87.605,88 C10.1 ; C12.2 C10.1 ; C9.1 C10.1
VIN+: AD9235.9 RL7.6 | length 34.9
  Bottom Layer w0.4: RL7.6 65.75,101.2
  Bottom Layer w1.1: 65.75,101.2 71.139,101.2 79.324,93.015 79.324,84.246 AD9235.9
VIN-: AD9235.10 RL7.3 | length 43.8
  Bottom Layer w0.4: RL7.3 57.15,101.2 60.807,97.543
  Bottom Layer w1.1: 60.807,97.543 71.113,97.543 75.108,93.548 75.108,83.372 79.378,79.101 81.929,79.101 AD9235.10
pads on no net: 2529.2 2529.3 2529.4 2529.6 2529.8 2529.9 2529.10 2529.11 2529.12 2529.13 2529.14 2529.15 2529.16 2529.17 2529.18 2529.19 2529.20 2529.21 2529.22 2529.23 2529.24 2529.25 2529.26 2529.27 2529.28 2529.29 2529.30 2529.31 2529.32 2529.33 2529.34 2529.35 2529.36 2529.37 2529.38 2529.39 2529.40 NI_4130.5 NI_4130.6 NI_4130.9 NI_4130.10 NI_4142.8 NI_4142.25 NI_4142.26 T1-1T.5 U2.2 U2.3 U2.46 U2.47 XC2.16 XC2.18 XC2.20 XC2.22 XC2.24 XC2.26 XC2.28 XC2.30 XC2.32 XC2.34
copper on no net:
  other v2: 141.44,48.16 124.24,48.26 158.44,48.36 141.44,53.24 124.24,53.34 158.44,53.44 124.34,94.76 140.24,94.76 156.04,94.76 124.34,99.84 140.24,99.84 156.04,99.84
  other v3: 35,34.3 175,34.3 35,124.3 175,124.3

## Polygon pours and split planes (outlines as drawn)
GND on Bottom Layer "Top Layer-No Net" (solid, pour order 6): 180,29.3 180,129.3 180,127.75 177.75,125.5 163,110.75 162.5,110.75 121.75,110.75 121,111.5 89.75,80.25 89.75,60.25 87.5,58 58.75,29.25
AGND on Bottom Layer "Top Layer-No Net" (solid, pour order 2): 30,129.3 30.45,129.3 180,129.3 179.55,129.3 168.5,118.25 163,112.75 118.25,112.75 118.25,110.5 89,81.25 89,76.5 89,60.5 64,35.5 57.8,29.3 30,29.3
GND on Top Layer "Top Layer-No Net" (solid, pour order 4): 30,129.3 180,129.3 180,29.3 30,29.3

## Silkscreen, mask and mechanical layers (free items; w line width, h text height)
Top Overlay:
  lines w0.15: 115.035,36.53 116.035,36.53 ; 118.035,33.53 116.035,33.53 ; 118.035,38.53 116.035,38.53 ; 118.035,39.53 116.035,39.53 ; 119.035,38.53 120.035,38.53 ; 120.035,33.53 123.035,33.53 123.535,33.53 123.535,32.03 122.035,32.03 122.035,32.53 122.035,34.53 ; 120.035,34.53 123.035,34.53 ; 121.035,32.53 121.035,34.53 ; 121.035,40.53 121.035,37.53 123.035,37.53 ; 122.035,37.53 122.035,40.53 ; 122.535,36.53 123.035,36.53 ; 123.035,38.53 121.035,38.53 ; 115.035,33.53 115.035,32.53 116.035,32.53 ; 115.035,33.53 116.035,33.53 ; 115.035,33.53 115.035,34.53 ; 115.035,33.53 114.535,33.53 114.535,32.03 116.035,32.03 116.035,32.53 ; 115.035,34.53 115.035,35.53 ; 115.035,34.53 116.035,34.53 ; 115.035,35.53 116.035,35.53 ; 115.035,35.53 114.535,35.53 114.535,37.53 115.035,37.53 ; 115.035,37.53 115.035,38.53 ; 115.035,37.53 116.035,37.53 ; 115.035,38.53 115.035,39.53 ; 115.035,38.53 116.035,38.53 ; 115.035,39.53 116.035,39.53 ; 115.035,39.53 115.035,40.53 116.035,40.53 ; 115.035,39.53 114.535,39.53 114.535,41.03 116.035,41.03 116.035,40.53 ; 116.035,32.53 117.035,32.53 ; 116.035,32.53 116.035,33.53 ; 116.035,33.53 116.035,34.53 ; 116.035,34.53 118.035,34.53 118.035,32.53 ; 116.035,34.53 116.035,35.53 ; 116.035,35.53 117.035,35.53 117.035,32.53 ; 116.035,37.53 116.035,38.53 ; 116.035,37.53 117.035,37.53 ; 116.035,38.53 116.035,39.53 ; 116.035,39.53 116.035,40.53 ; 116.035,40.53 117.035,40.53 ; 117.035,32.53 118.035,32.53 ; 117.035,37.53 117.035,40.53 ; 117.035,37.53 118.035,37.53 118.035,40.53 ; 117.035,40.53 118.035,40.53 ; 118.035,32.53 118.035,32.03 119.535,32.03 120.035,32.03 120.035,32.53 ; 118.035,40.53 118.035,41.03 120.035,41.03 120.035,40.53 ; 119.035,39.53 119.035,40.53 120.035,40.53 ; 119.035,39.53 123.035,39.53 123.535,39.53 123.535,41.03 122.035,41.03 122.035,40.53 ; 119.035,39.53 119.035,37.53 120.035,37.53 120.035,40.53 ; 120.035,32.53 120.035,35.53 121.035,35.53 121.035,34.53 ; 120.035,32.53 123.035,32.53 123.035,35.53 ; 120.035,38.53 121.035,38.53 ; 120.035,38.53 121.035,38.53 ; 120.035,40.53 122.035,40.53 ; 121.035,34.53 122.035,34.53 ; 122.035,34.53 122.035,35.53 123.035,35.53 ; 122.035,40.53 123.035,40.53 123.035,37.53 ; 123.035,35.53 123.535,35.53 123.535,37.53 123.035,37.53
  lines w0.3: 116.035,36.53 116.535,36.53 117.035,37.03 ; 118.535,40.53 118.535,35.93 ; 120.535,37.13 120.535,36.93 121.535,35.93 ; 120.535,37.73 120.535,38.03 ; 120.535,37.93 120.535,37.03 120.035,36.53 119.735,36.83 119.535,37.03 119.535,33.03 ; 121.535,35.03 121.535,36.53 122.035,37.03 122.535,36.53 ; 117.035,37.03 117.035,37.03 ; 117.035,37.03 117.635,36.43 117.635,35.03 118.335,35.73 118.535,35.93 ; 118.535,35.93 118.535,33.03 119.035,32.53 119.535,33.03 ; 119.535,33.03 119.535,33.03
  text "ACK.066.012.16" at 130,34.3 h3
Mechanical 1:
  the board outline again, w0.254

## Text inside footprints (layer, text, board x,y; h text height)
AD9235: Top Overlay "TSSOP-28" at 86.75,105.5 h1.5; Top Overlay "OTS-28-0.65-01" at 81.275,61.99 h1.5